# EAGLE board ETC_module (EAGLE 7.4.0)
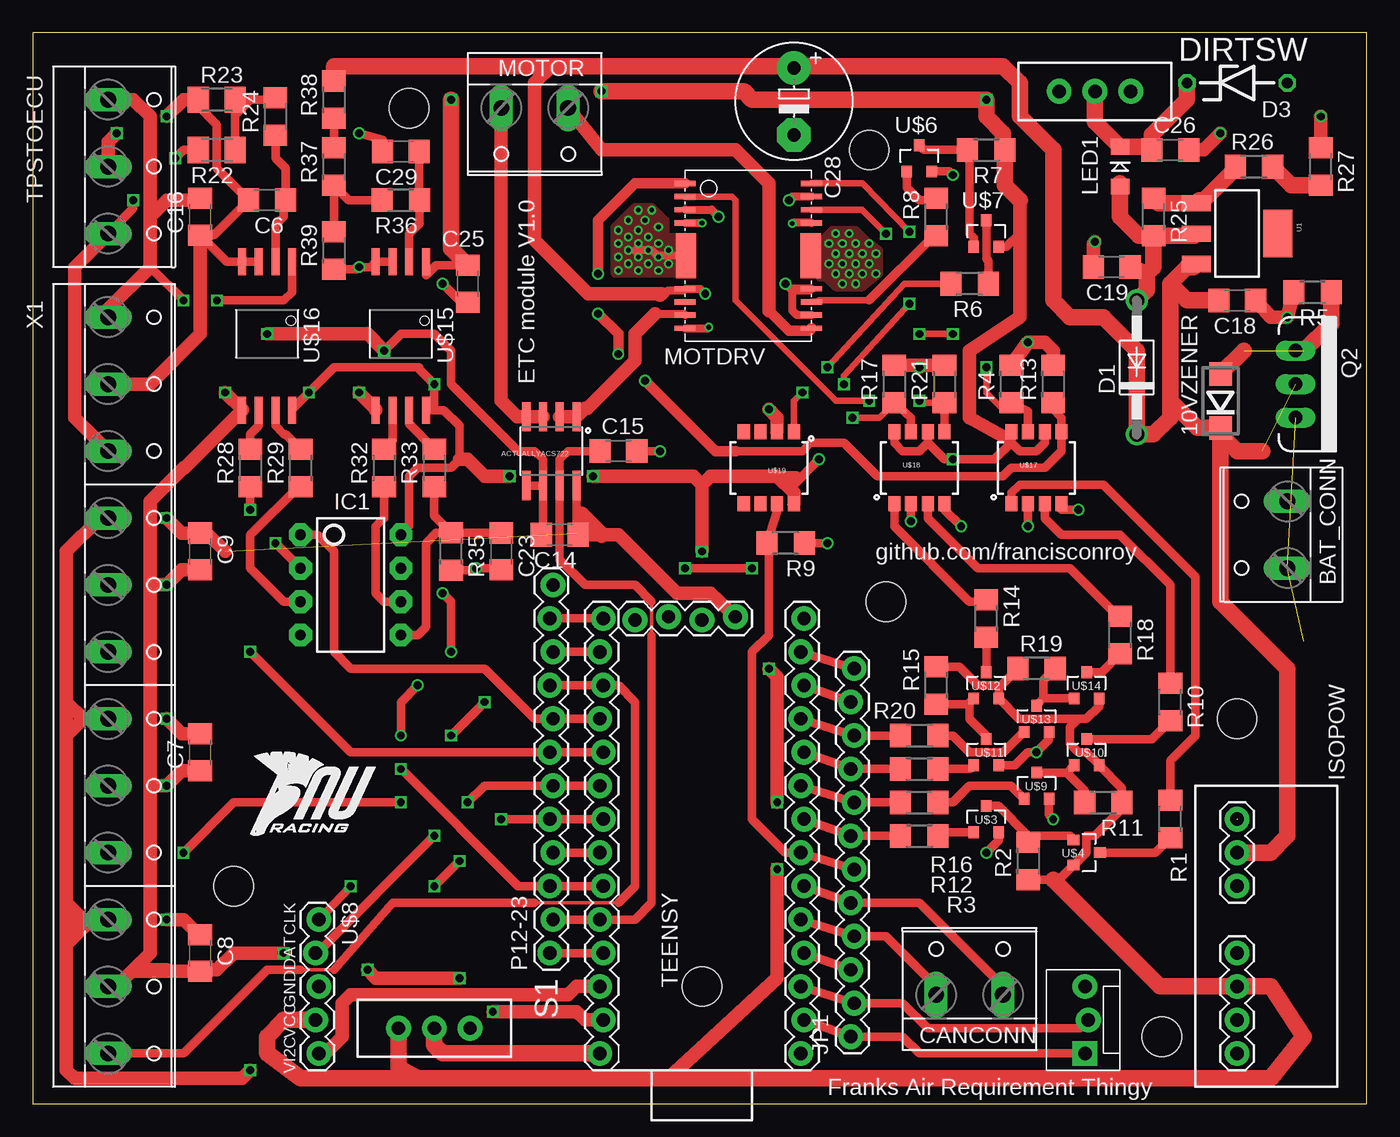
[diagram p0: board, top side]
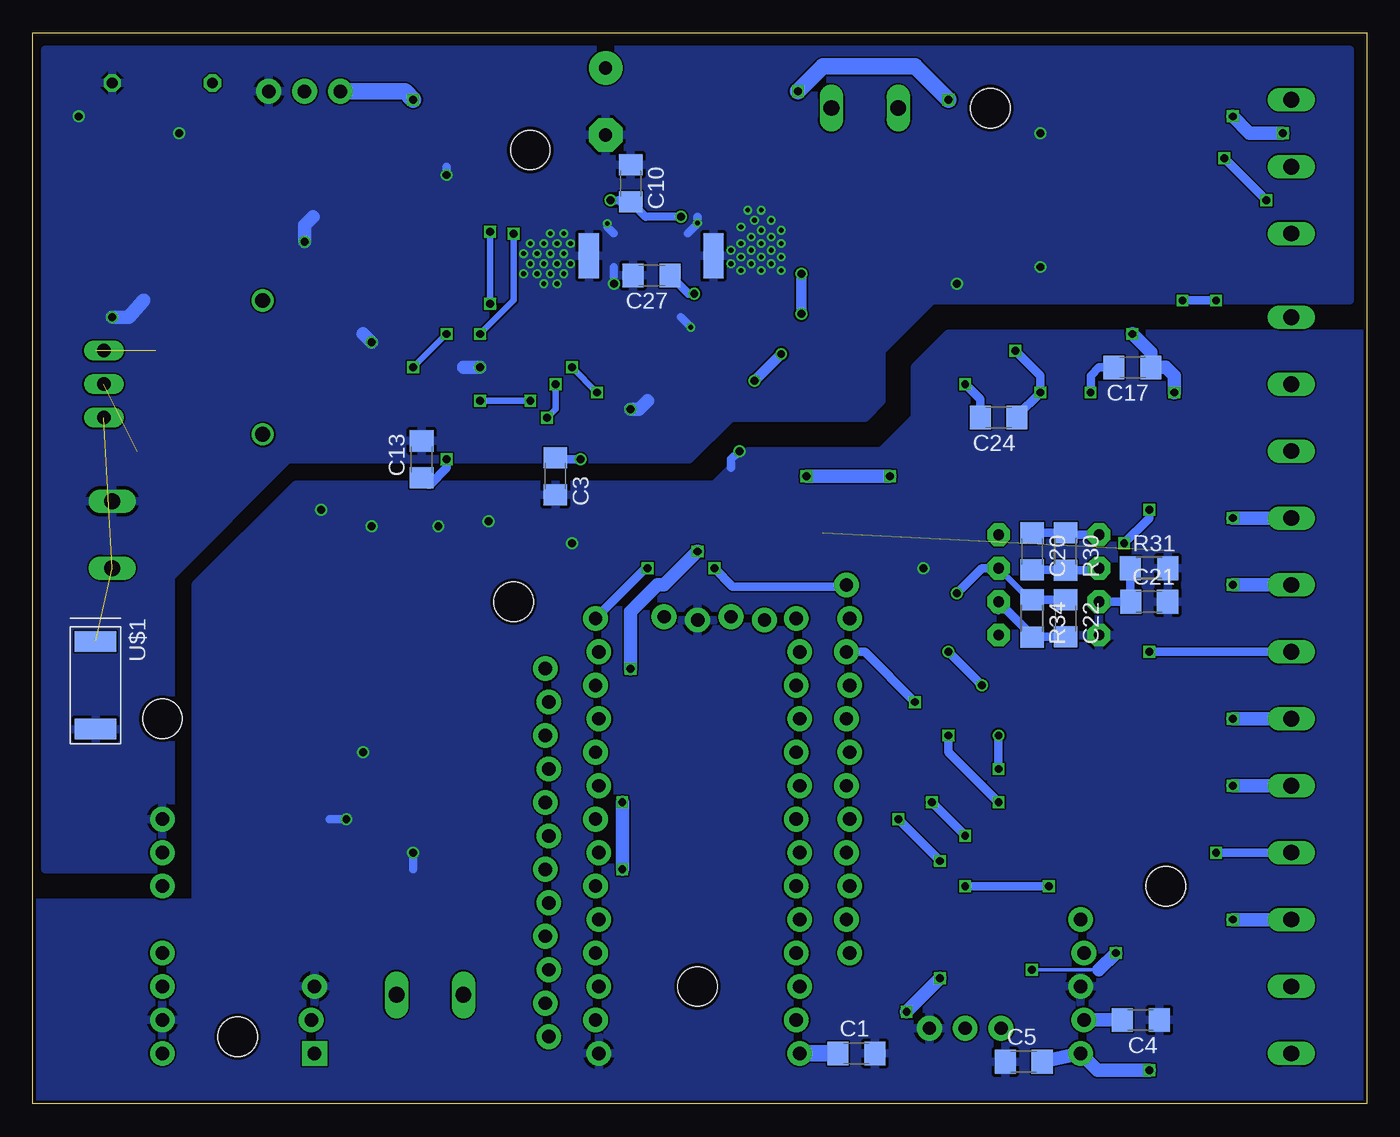
[diagram p1: board, bottom side, seen from below]

Size 101.27 x 81.27 mm. Coordinates in mm from the lower left corner, seen from the top.
Outline: 0,0 101.27,0 101.27,81.27 0,81.27 0,0
Copper layers (1*16): Top 0.035mm / dielectric 1.5mm / Bottom 0.035mm
Design rules "dirt_cheap_dirty_boards.v1": minimum track width 5mil, minimum drill 12mil, track to track 5mil, track to pad 5mil, pad to pad 5mil, via to via 5mil, smd to smd 0mil, copper to edge 10mil, drill to drill 10mil, minimum pad ring 10mil, minimum via ring 6mil, stop-mask expansion 2mil, vias tented up to drill 25mil, thermal gap 10mil
Holes 3 mm at 15.24,16.51 63.5,72.39 64.77,38.1 91.44,29.21 85.72,5.08 50.8,8.89 28.57,75.56

## Footprints (pad centres in the part's own frame; a part is rotated, then mirrored left to right if it is on the bottom)
DO214BA = smd 1.8 x 1.7: A 2.05,0; C -2.05,0
SO08 = smd 0.61 x 2.21: 1 -1.905,-2.616; 2 -0.635,-2.616; 3 0.635,-2.616; 4 1.905,-2.616; 5 1.905,2.616; 6 0.635,2.616; 7 -0.635,2.616; 8 -1.905,2.616
W237-132 = drill 1.194 long: 1 -2.54,-0.635; 2 2.54,-0.635
C1206 = smd 1.6 x 1.8: 1 -1.4,0; 2 1.4,0
E5-8,5 = drill 1.016 pad 2.54: + -2.54,0 | drill 1.016 pad 2.54 octagon: - 2.54,0
DO41-10 = drill 1.118: A 5.08,0; C -5.08,0
ZDIO-7.5 = drill 0.813 octagon: A 3.81,0; C -3.81,0
SWITCH-SPDT_KIT = drill 1.016 pad 1.88: 1 0,2.718; 2 0,0; 3 0,-2.718
DIP08 = drill 0.813 pad 1.727 octagon: 1 -3.81,-3.81; 2 -1.27,-3.81; 3 1.27,-3.81; 4 3.81,-3.81; 5 3.81,3.81; 6 1.27,3.81; 7 -1.27,3.81; 8 -3.81,3.81
TRACOPOWERDC-DCTRM2WIN = drill 1.016 pad 1.88: 1 -8.89,0; 2 -6.35,0; 3 -3.81,0; 5 1.27,0; 6 3.81,0; 7 6.35,0; 8 8.89,0
1X12_LOCK = drill 1.016 pad 1.88: 1 0,0.127; 2 2.54,-0.127; 3 5.08,0.127; 4 7.62,-0.127; 5 10.16,0.127; 6 12.7,-0.127; 7 15.24,0.127; 8 17.78,-0.127; 9 20.32,0.127; 10 22.86,-0.127; 11 25.4,0.127; 12 27.94,-0.127
MOLEX-1X3_LOCK = drill 1.016 pad 1.88 square: 1 0,0.127 | drill 1.016 pad 1.88: 2 2.54,-0.127; 3 5.08,0.127
LED-1206 = smd 1.2 x 1.4: A -1.5,0; C 1.5,0
HSOP16-P-300-1.00 = smd 0.4 x 1.6: ALERT 9,9.6; IN1 0,0; IN2 0,9.6; NC 9,0; OUT1 10,0; OUT2 11,9.6; P-GND 10,9.6; PWM 2,9.6; RSA 11,0; S-GND 3,0; S-GND2 8,9.6; S-GND3 3,9.6; SB 1,0; VCC 8,0; VREF 2,0; VREG 1,9.6 | smd 3.4 x 1.524: FIN 5.5,9.53; FIN2 5.5,0.07 | smd 3.4 x 1.524 bottom: P$4 5.5,0.07; P$20 5.5,9.53
TO220V = drill 1.016 long: 1 -2.54,0; 2 0,0; 3 2.54,0
R1206 = smd 1.6 x 1.803: 1 -1.422,0; 2 1.422,0
M1206 = smd 1.6 x 2: 1 -1.4,0; 2 1.4,0
TEENSY31PAC = drill 1.016 pad 1.88: 0 -13.97,-6.477; 1 -11.43,-6.223; 2 -8.89,-6.477; 3 -6.35,-6.223; 3.3V 16.637,-1.27; 3.3VV -11.43,9.017; 4 -3.81,-6.477; 5 -1.27,-6.223; 6 1.27,-6.477; 7 3.81,-6.223; 8 6.35,-6.477; 9 8.89,-6.223; 10 11.43,-6.477; 11 13.97,-6.223; 12 16.51,-6.477; 13 16.51,8.763; 14 13.97,9.017; 15 11.43,8.763; 16 8.89,9.017; 17 6.35,8.763; 18 3.81,9.017; 19 1.27,8.763; 20 -1.27,9.017; 21 -3.81,8.763; 22 -6.35,9.017; 23 -8.89,8.763; A14/DAC 16.383,6.35; AGND -13.97,8.763; GND -16.51,-6.223; GND2 16.383,1.27; PROG 16.637,3.81; VIN -16.51,9.017
W237-133 = drill 1.194 long: 1 -5.08,-0.635; 2 0,-0.635; 3 5.08,-0.635
SOT223 = smd 1.219 x 2.235: 1 -2.311,-3.099; 2 0,-3.099; 3 2.311,-3.099 | smd 3.6 x 2.2: 4 0,3.099
JEDECDO-214AB = smd 1.549 x 3.15: A 3.327,0; K -3.327,0
SOT23-3 = smd 0.8 x 0.9: 1 -0.95,-1; 2 0.95,-1; 3 0,1
DISP_CONN = drill 1.016 pad 1.88: 1 -5.08,0.127; 2 -2.54,-0.127; 3 0,0.127; 4 2.54,-0.127; 5 5.08,0.127
SO8STRETCH = smd 0.61 x 2.032: 1 -1.905,-5.474; 2 -0.635,-5.474; 3 0.635,-5.474; 4 1.905,-5.474; 5 1.905,5.791; 6 0.635,5.791; 7 -0.635,5.791; 8 -1.905,5.791
SO08-2 = smd 0.914 x 1.143: 1 -1.905,-2.731; 2 -0.635,-2.731; 3 0.635,-2.731; 4 1.905,-2.731; 5 1.905,2.731; 6 0.635,2.731; 7 -0.635,2.731; 8 -1.905,2.731
W237-12P = drill 1.194 long: 1 -27.94,-0.635; 2 -22.86,-0.635; 3 -17.78,-0.635; 4 -12.7,-0.635; 5 -7.62,-0.635; 6 -2.54,-0.635; 7 2.54,-0.635; 8 7.62,-0.635; 9 12.7,-0.635; 10 17.78,-0.635; 11 22.86,-0.635; 12 27.94,-0.635

## Placement (x,y rotation side)
10VZENER  [DO214BA]  90.17,53.34 90 top
ACTUALLYACS722  ACS722  [SO08]  39.37,49.53 180 top
BAT_CONN  [W237-132]  94.61,43.18 90 top
C1  0.1uF  [C1206]  38.73,3.81 0 bottom
C3  0.1uF  [C1206]  61.59,47.62 270 bottom
C4  0.1uF  [C1206]  17.14,6.35 180 bottom
C5  0.1uF  [C1206]  26.04,3.17 0 bottom
C6  10n  [C1206]  17.78,68.58 180 top
C7  0.1uF  [C1206]  12.7,26.67 90 top
C8  0.1 uF  [C1206]  12.7,11.43 270 top
C9  0.1uF  [C1206]  12.7,41.91 270 top
C10  0.1 uF  [C1206]  55.88,69.85 270 bottom
C13  0.1uF  [C1206]  71.75,48.9 90 bottom
C14  0.1 uF  [C1206]  40.01,43.18 180 top
C15  1nF  [C1206]  44.45,49.53 0 top
C16  0.1uF  [C1206]  12.7,67.31 90 top
C17  0.1uF  [C1206]  17.78,55.88 180 bottom
C18  0.1uF  [C1206]  91.44,60.96 0 top
C19  1uF  [C1206]  81.92,63.5 180 top
C20  1nF  [C1206]  25.4,41.91 270 bottom
C21  1nF  [C1206]  16.51,38.1 0 bottom
C22  1nF  [C1206]  22.86,36.83 270 bottom
C23  1nF  [C1206]  35.56,41.91 270 top
C24  0.1uF  [C1206]  27.94,52.07 180 bottom
C25  0.1uF  [C1206]  33.02,62.23 90 top
C26  0.1uF  [C1206]  86.36,72.39 0 top
C27  1uF  [C1206]  54.29,62.87 180 bottom
C28  47uF  [E5-8,5]  57.78,76.07 270 top
C29  10n  [C1206]  27.94,72.26 180 top
CANCONN  [W237-132]  71.12,8.89 0 top
D1  1N4004  [DO41-10]  83.82,55.88 90 top
D3  7.5V  [ZDIO-7.5]  91.44,77.47 0 top
DIRTSW  DIRTY 5V  [SWITCH-SPDT_KIT]  80.64,76.83 270 top
IC1  LM358  [DIP08]  24.13,39.37 270 top
ISOPOW  TRACOTMR2WIN  [TRACOPOWERDC-DCTRM2WIN]  91.44,12.7 270 top
JP1  P0-11  [1X12_LOCK]  62.23,5.08 90 top
JP3  SER  [MOLEX-1X3_LOCK]  80.01,3.81 90 top
LED1  FUSE HERE  [LED-1206]  82.55,71.12 90 top
MOTDRV  TB6559FG  [HSOP16-P-300-1.00]  49.53,69.85 270 top
MOTOR  [W237-132]  38.1,74.93 180 top
P12-23  P12-23  [1X12_LOCK]  39.37,11.43 90 top
Q2  MOSFET-PCHANNELFQP27P06  [TO220V]  95.89,54.61 270 top
R1  270  [R1206]  86.36,21.59 270 top
R2  10k  [R1206]  75.56,18.41 90 top
R3  4.7k  [R1206]  67.31,20.32 180 top
R4  1k  [R1206]  74.3,54.61 90 top
R5  1k  [R1206]  97.16,61.59 180 top
R6  270  [R1206]  71.12,62.23 0 top
R7  10k  [R1206]  72.39,72.39 180 top
R8  4.7k  [R1206]  68.58,67.31 270 top
R9  1k  [R1206]  57.15,42.55 0 top
R10  270  [R1206]  86.36,30.48 270 top
R11  10k  [R1206]  81.28,22.86 180 top
R12  4.7k  [R1206]  67.31,22.86 180 top
R13  1k  [R1206]  77.47,54.61 90 top
R14  270  [R1206]  72.39,36.83 270 top
R15  10k  [R1206]  68.58,31.75 270 top
R16  4.7k  [R1206]  67.31,25.4 180 top
R17  1k  [R1206]  65.41,54.61 90 top
R18  270  [R1206]  82.55,35.56 270 top
R19  10k  [R1206]  76.2,33.02 0 top
R20  4.7k  [R1206]  67.31,27.94 180 top
R21  1k  [R1206]  69.22,54.61 90 top
R22  3k  [M1206]  13.97,72.39 180 top
R23  2k  [M1206]  13.97,76.2 0 top
R24  39  [R1206]  18.41,74.93 90 top
R25  240  [R1206]  85.09,67.31 270 top
R26  680  [R1206]  92.71,71.12 180 top
R27  33  [R1206]  97.79,71.12 270 top
R28  20k  [R1206]  16.51,48.26 90 top
R29  20k  [R1206]  20.32,48.26 90 top
R30  40k  [R1206]  22.86,41.91 270 bottom
R31  20k  [R1206]  16.51,40.64 0 bottom
R32  20k  [R1206]  26.67,48.26 90 top
R33  20k  [R1206]  30.48,48.26 90 top
R34  40k  [R1206]  25.4,36.83 270 bottom
R35  20k  [R1206]  31.75,41.91 270 top
R36  39  [R1206]  27.94,68.58 180 top
R37  56k  [R1206]  22.86,71.12 90 top
R38  4k7  [R1206]  22.86,76.2 90 top
R39  9k1  [R1206]  22.86,64.77 90 top
S1  LOGIC POWER  [SWITCH-SPDT_KIT]  30.48,5.71 270 top
TEENSY  TEENSY31DEV  [TEENSY31PAC]  52.07,20.32 90 top
TPSTOECU  [W237-133]  6.35,71.12 270 top
U1  V_REG_317SMD  [SOT223]  91.44,66.04 270 top
U$1  LNBTVS  [JEDECDO-214AB]  96.52,31.75 270 bottom
U$3  NPN_TRAN  [SOT23-3]  72.39,21.59 0 top
U$4  PNP_TRAN  [SOT23-3]  80.01,19.05 270 top
U$6  NPN_TRAN  [SOT23-3]  67.31,71.75 0 top
U$7  PNP_TRAN  [SOT23-3]  72.39,66.04 0 top
U$8  DISP_CONN  [DISP_CONN]  21.59,8.89 270 top
U$9  NPN_TRAN  [SOT23-3]  76.2,24.13 0 top
U$10  PNP_TRAN  [SOT23-3]  80.01,26.67 0 top
U$11  NPN_TRAN  [SOT23-3]  72.39,26.67 0 top
U$12  PNP_TRAN  [SOT23-3]  72.39,31.75 0 top
U$13  NPN_TRAN  [SOT23-3]  76.2,29.21 0 top
U$14  PNP_TRAN  [SOT23-3]  80.01,31.75 0 top
U$15  ACPLC87BT  [SO8STRETCH]  27.94,58.42 180 top
U$16  ACPLC87BT  [SO8STRETCH]  17.78,58.42 180 top
U$17  OPTOISOLATOR-2SOIC8  [SO08-2]  76.2,48.26 0 top
U$18  OPTOISOLATOR-2SOIC8  [SO08-2]  67.31,48.26 0 top
U$19  OPTOISOLATOR-2SOIC8  [SO08-2]  55.88,48.26 180 top
U$20  [NURLOGO]  16.51,20.32 0 top
X1  [W237-12P]  6.35,31.75 270 top

## Library data of the parts
10VZENER D1 D3 = diode
ACTUALLYACS722 = SparkFun-AnalogIC; PROD_ID: IC-08964
BAT_CONN CANCONN MOTOR TPSTOECU X1 = con-wago-508; OC_FARNELL: unknown; OC_NEWARK: unknown
C1 C3 C13 C26 R1-R4 R6-R21 = resistor
C4-C10 C14-C25 C27-C29 R5 R22-R39 = rcl
DIRTSW S1 = SparkFun-Electromechanical; PROD_ID: SWCH-08261
IC1 = SparkFun-AnalogIC; PROD_ID: IC-09172
ISOPOW MOTDRV TEENSY U$1 U$3 U$4 U$6-U$16 U$20 = custom
JP1 JP3 P12-23 = SparkFun-Connectors
LED1 = LilyPad-Wearables
Q2 = SparkFun-DiscreteSemi
U1 = SparkFun-PowerIC
U$17-U$19 = SparkFun-DiscreteSemi; PROD_ID: IC-09076

## Nets
5VOUT: C10.2 MOTDRV.VREF MOTDRV.VREG
+3V3: ACTUALLYACS722.8 C5.2 C7.2 C8.1 C9.1 C14.1 TEENSY.3.3V TEENSY.3.3VV U$8.5 X1.4 X1.7 X1.10
+5V/1: C13.1 C25.2 DIRTSW.3 R7.1 U$7.2 U$15.1 U$17.6 U$17.8 U$18.6 U$18.8
+5VCLEAN: C3.1 C4.2 C17.2 C24.2 IC1.8 ISOPOW.6 R2.1 R11.1 R15.1 R19.1 S1.3 U$4.2 U$8.4 U$10.2 U$12.2 U$14.2 U$15.8 U$16.8 U$19.8
+12V: 10VZENER.C C18.1 C27.1 C28.+ D1.C ISOPOW.2 MOTDRV.VCC Q2.2 R38.2 U1.3
AGND: ACTUALLYACS722.5 ACTUALLYACS722.6 C7.1 C8.2 C9.2 C14.2 C17.1 C24.1 TEENSY.AGND U$15.5 U$16.5 X1.5 X1.8 X1.11
ECU5V: C16.2 TPSTOECU.1 U$16.1 X1.1
ECUSENSGND: C6.2 C16.1 R23.1 TPSTOECU.2 U$16.3 U$16.4 X1.2
ECUTPS: R22.2 TPSTOECU.3 X1.3
GND: C1.2 C3.2 C4.1 C5.1 C15.2 C21.2 C23.2 IC1.4 ISOPOW.7 JP3.3 R9.2 R31.2 R35.2 S1.1 TEENSY.GND TEENSY.GND2 U$3.2 U$8.3 U$9.2 U$11.2 U$13.2 U$17.2 U$17.4 U$18.2 U$18.4
GNDI: BAT_CONN.2 C10.1 C13.2 C18.2 C19.2 C25.1 C26.2 C27.2 C28.- C29.2 D3.A DIRTSW.1 ISOPOW.1 MOTDRV.FIN MOTDRV.FIN2 MOTDRV.P$4 MOTDRV.P$20 MOTDRV.P-GND MOTDRV.RSA MOTDRV.S-GND MOTDRV.S-GND2 MOTDRV.S-GND3 R4.2 R5.2 R13.2 R17.2 R21.2 R27.1 R39.1 U$1.A U$6.2 U$15.3 U$15.4 U$19.2
N$1: R2.2 U$3.3 U$4.1
N$2: C1.1 S1.2 TEENSY.VIN
N$3: R1.1 U$17.1
N$4: R1.2 U$4.3
N$5: R3.1 U$3.1
N$6: R7.2 U$6.3 U$7.1
N$7: 10VZENER.A Q2.1 R5.1
N$8: MOTDRV.PWM R4.1 U$17.7
N$9: R6.1 U$19.1
N$10: R6.2 U$7.3
N$11: R8.1 U$6.1
N$12: R19.2 U$13.3 U$14.1
N$14: R18.1 U$18.3
N$15: C26.1 D3.C DIRTSW.2 LED1.C
N$16: R37.2 R38.1
N$17: C19.1 D1.A LED1.A R25.2 U1.2
N$18: R11.2 U$9.3 U$10.1
N$19: MOTDRV.OUT2 MOTOR.1
N$20: ACTUALLYACS722.1 ACTUALLYACS722.2 MOTDRV.OUT1
N$21: R10.1 U$17.3
N$22: R10.2 U$10.3
N$23: R12.1 U$9.1
N$25: R15.2 U$11.3 U$12.1
N$26: R14.1 U$18.1
N$27: R14.2 U$12.3
N$28: R16.1 U$11.1
N$29: MOTDRV.IN2 R17.1 U$18.7
N$30: R18.2 U$14.3
N$31: R20.1 U$13.1
N$32: MOTDRV.ALERT R8.2
N$33: MOTDRV.SB R21.1 U$18.5
N$34: ACTUALLYACS722.3 ACTUALLYACS722.4 MOTOR.2
N$35: C6.1 R24.1 U$16.2
N$36: R22.1 R23.2 R24.2
N$37: R26.1 R27.2
N$38: R25.1 R26.2 U1.1
N$39: R36.2 R37.1 R39.2
N$40: C23.1 IC1.5 R33.1 R35.1
N$41: C22.2 IC1.6 R32.1 R34.2
N$42: R32.2 U$15.6
N$43: MOTDRV.IN1 R13.1 U$17.5
N$44: R29.2 U$16.7
N$45: C21.1 IC1.3 R29.1 R31.1
N$46: C20.2 IC1.2 R28.1 R30.2
N$47: R28.2 U$16.6
N$48: C29.1 R36.1 U$15.2
N$52: R33.2 U$15.7
N$58: BAT_CONN.1 Q2.3 U$1.K
P0: JP1.1 JP3.1 TEENSY.0
P1: JP1.2 JP3.2 TEENSY.1
P2: JP1.3 TEENSY.2
P3: CANCONN.1 JP1.4 TEENSY.3
P4: CANCONN.2 JP1.5 TEENSY.4
P5: JP1.6 R9.1 TEENSY.5 U$19.7
P6: JP1.7 R3.2 TEENSY.6
P7: JP1.8 R12.2 TEENSY.7
P8: JP1.9 R16.2 TEENSY.8
P9: JP1.10 R20.2 TEENSY.9
P10: JP1.11 TEENSY.10
P11: JP1.12 TEENSY.11
P12: P12-23.12 TEENSY.12
P13: P12-23.11 TEENSY.13
P14: P12-23.10 TEENSY.14 X1.9
P15: P12-23.9 TEENSY.15 X1.12
P16: C20.1 IC1.1 P12-23.8 R30.1 TEENSY.16
P17: P12-23.7 TEENSY.17 X1.6
P18: P12-23.6 TEENSY.18 U$8.2
P19: P12-23.5 TEENSY.19 U$8.1
P20: P12-23.4 TEENSY.20
P21: C22.1 IC1.7 P12-23.3 R34.1 TEENSY.21
P22: ACTUALLYACS722.7 C15.1 P12-23.2 TEENSY.22
P23: P12-23.1 TEENSY.23

## Tracks (layer width: path | path; a pad name or v marks a point on that pad's centre or on a via)
5VOUT  (via drill 0.6)
  Top 0.61: MOTDRV.VREF 51.53,67.85 v52.07,67.31 | MOTDRV.VREG 57.67,68.85 v57.4,68.58
  Bottom 0.61: v52.07,67.31 54.74,67.31 C10.2 56.26,68.07 56.77,68.58 v57.4,68.58
  Bottom 0.635: 55.38,67.94 C10.2 56.01,68.58
+3V3  (via drill 0.6)  (1 unrouted)
  Top 0.635: ACTUALLYACS722.8 41.27,43.31 C14.1
  Top 1.016: TEENSY.3.3VV 41.27,8.89 40.64,8.26 24.13,8.26 23.5,7.62 23.5,5.08 22.23,3.81 U$8.5 | 2.54,12.06 4.45,13.97 X1.10 3.81,13.97 | 2.54,12.06 2.54,2.54 3.17,1.91 15.88,1.91 v16.51,2.54 | 3.81,13.97 2.54,15.24 | 2.54,15.24 2.54,27.94 | 2.54,27.94 2.54,30.48 | 2.54,30.48 2.54,41.91 5.08,44.45 X1.4 | C7.2 11.3,28.07 v10.16,29.21 | v10.16,44.45 11.3,43.31 C9.1 13.21,43.31 14.61,41.91 | C8.1 12.57,12.83 11.43,13.97 v10.16,13.97 | TEENSY.3.3V 51.44,38.73 48.9,38.73 44.45,43.18 43.18,43.18 C14.1 | X1.7 3.81,29.21 | 3.81,29.21 2.54,27.94 | 3.81,29.21 2.54,30.48 | 2.54,15.24 2.54,13.97 | 2.54,12.06 2.54,12.7 | 2.54,12.7 2.54,13.97 | 2.54,13.97 3.81,13.97 | 3.81,13.97 2.54,12.7
  Top 1.27: 43.18,43.18 41.66,44.7
  Bottom 1.016: v16.51,2.54 20.45,2.54 U$8.5 C5.2 | v10.16,29.21 X1.7 | v10.16,44.45 X1.4 | v10.16,13.97 X1.10 5.08,13.97
+5V/1  (via drill 0.6)
  Top 0.635: C25.2 30.61,63.63 29.84,62.87 U$15.1 | U$18.8 65.41,50.16 66.04,49.53 67.31,49.53 67.94,50.16 | 67.94,50.16 U$18.6 | U$17.6 76.83,50.16 76.2,49.53 74.93,49.53 74.3,50.16 | 74.3,50.16 U$17.8 74.3,50.8 73.98,50.48 | 67.94,50.16 69.22,48.9 v69.85,48.9 73.03,48.9 74.3,50.16 | U$7.2 73.93,65.04 74.93,66.04
  Top 1.016: 74.93,68.58 74.93,66.04 74.93,59.69 71.12,57.15 71.12,52.07 73.98,50.48
  Top 1.27: v72.39,76.2 68.58,76.2 | v72.39,76.2 54.61,76.2 53.98,76.83 v43.18,76.83 | v31.75,76.2 31.75,64.9 C25.2 | v72.39,76.2 72.39,74.93 73.66,73.66 73.66,72.54 R7.1 73.81,69.7 74.93,68.58
  Bottom 0.635: v69.85,48.9 69.85,48.26 71.12,46.99 71.25,46.99 C13.1
  Bottom 1.27: DIRTSW.3 73.03,76.83 v72.39,76.2 | v43.18,76.83 41.27,78.74 34.29,78.74 v31.75,76.2
+5VCLEAN  (via drill 0.6)
  Top 0.635: U$14.2 80.96,30.16 80.01,29.21 79.38,29.21 | 79.38,29.21 74.88,29.21 U$12.2 73.34,31.58 | 73.34,31.58 R19.1 | 79.38,29.21 78.74,28.57 78.74,27.3 79.38,26.67 80.01,26.67 80.96,25.72 U$10.2 82.7,23.93 R11.1 82.55,22.71 82.55,22.23 80.64,20.32 80.01,20.32 80.01,19.05 79.06,18.1 U$4.2 77.9,16.99 77.47,16.99 R2.1 | R15.1 70.33,33.17 71.75,31.75 73.17,31.75 73.34,31.58 | v59.69,48.9 57.78,46.99 57.78,46.35 | IC1.8 28.57,43.81 28.57,47.62 29.21,48.26 31.75,48.26 32.38,48.9 32.38,51.44 31.19,52.63 30.48,52.63 | U$15.8 30.48,52.63 | 30.48,52.63 v30.48,54.61 29.34,55.75 29.34,55.88 22.86,55.88 v20.95,53.98 19.68,52.7 U$16.8
  Top 1.016: 48.26,1.91 56.52,9.53 v56.52,17.78 | U$19.8 57.78,46.35 56.52,47.62 51.44,47.62 50.8,46.99 | 50.8,46.99 v50.8,41.91 | 50.8,46.99 50.16,47.62 v42.55,47.62 | v36.2,47.62 34.29,47.62 33.02,48.9 32.38,48.9 | v56.52,22.86 56.52,32.38 v55.88,33.02
  Top 1.27: 77.47,16.99 85.57,8.89 ISOPOW.6 93.98,8.89 96.52,5.08 93.98,1.91 48.26,1.91 29.21,1.91 | S1.3 27.76,2.72 29.21,1.91 | 29.21,1.91 20.32,1.91 17.78,3.81 17.78,5.08 19.05,6.35 U$8.4 | 21.33,6.22 U$8.4 | 20.32,6.35 U$8.4
  Bottom 0.635: C3.1 61.47,48.9 v59.69,48.9 | C24.2 29.34,53.47 v30.48,54.61 | C17.2 20.32,55.88 20.95,55.24 v20.95,53.98
  Bottom 1.016: C4.2 U$8.4 | v56.52,17.78 v56.52,22.86 | v42.55,47.62 v36.2,47.62 | v50.8,41.91 53.34,39.37 53.85,39.37 55.88,37.34 v55.88,33.02
+12V  (via drill 0.6)  (1 unrouted)
  Top 0.61: 47.75,61.47 48.01,61.47 48.26,61.72 49.4,61.72 MOTDRV.VCC 50.67,61.85 v51.05,61.47
  Top 1.016: 39.37,78.74 38.1,77.47 38.1,65.53 42.16,61.47 47.75,61.47 47.62,61.34 | C28.+ 62.1,78.61 62.23,78.74
  Top 1.27: ISOPOW.2 93.98,19.05 95.25,20.32 95.25,33.02 90.17,38.1 10VZENER.C | 10VZENER.C 90.17,50.8 91.44,49.53 93.34,49.53 | 10VZENER.C 88.41,51.29 86.36,53.34 | 86.36,53.34 86.36,62.23 | 86.36,62.23 87.63,63.5 88.11,63.5 U1.3 | C18.1 87.63,60.96 86.36,62.23 | 86.36,53.34 86.36,52.07 85.09,50.8 D1.C 83.82,57.15 81.28,59.69 78.74,59.69 77.47,60.96 77.47,72.39 74.93,74.93 74.93,77.47 73.66,78.74 62.23,78.74 39.37,78.74 22.86,78.74 R38.2
  Bottom 0.61: C27.1 51.49,61.47 v51.05,61.47
AGND  (via drill 0.6)
  Top 0.635: ACTUALLYACS722.6 38.73,43.31 C14.2 | ACTUALLYACS722.6 38.73,48.9 38.1,49.53 36.83,49.53 31.75,54.61 31.75,57.15 30.48,58.42 27.94,58.42 v26.67,57.15 | ACTUALLYACS722.6 ACTUALLYACS722.5
  Top 1.016: TEENSY.AGND 41.91,6.35 41.27,6.99 v34.92,6.99 | v32.38,9.53 26.04,9.53 v25.4,10.16 | v19.05,11.43 15.24,11.43 13.97,10.16 12.83,10.16 C8.2 7.49,10.03 | 7.49,10.03 6.35,8.89 X1.11 | 7.49,10.03 7.62,10.16 | 7.62,10.16 10.16,10.16 | 7.62,10.16 8.89,11.43 8.89,24.13 | v14.61,53.98 15.88,52.7 U$16.5 11.51,48.26 11.43,48.26 8.89,45.72 8.89,39.37 | U$15.5 26.04,52.7 v24.77,53.98 | v17.78,58.42 25.4,58.42 v26.67,57.15 | 8.89,39.37 8.89,24.13 | C7.1 11.3,25.27 v10.16,24.13 8.89,24.13 | C9.2 11.3,40.51 v10.16,39.37 8.89,39.37
  Bottom 0.254: v25.4,10.16 20.32,10.16
  Bottom 0.635: v26.67,57.15 24.77,55.24 v24.77,53.98 26.54,52.2 C24.1
  Bottom 1.016: v34.92,6.99 v32.38,9.53 | 20.32,10.16 v19.05,11.43 | v14.61,53.98 14.61,55.24 15.24,55.88 C17.1 16.38,57.02 v17.78,58.42 | v10.16,24.13 X1.8 | v10.16,39.37 X1.5
ECU5V  (via drill 0.6)
  Top 0.635: U$16.1 19.68,61.59 19.05,60.96 v13.97,60.96 | v11.43,60.96 8.89,63.5
  Top 1.016: X1.1 5.71,60.33 8.89,63.5 8.89,67.31 | 8.89,67.31 8.89,74.93 7.62,76.2 TPSTOECU.1 | 8.89,67.31 10.16,68.58 12.57,68.58 C16.2
  Bottom 0.635: v13.97,60.96 v11.43,60.96
ECUSENSGND  (via drill 0.6)
  Top 0.635: U$16.3 U$16.4 14.72,63.89 C16.1 13.71,65.91 C6.2 13.97,70.99 13.97,74.3 12.57,75.69 R23.1
  Top 1.016: X1.2 8.89,54.61 12.7,58.42 C16.1 | TPSTOECU.2 5.71,73.03 v6.35,73.66 | v10.16,74.93 11.43,76.2 R23.1
  Bottom 1.016: v6.35,73.66 8.89,73.66 v10.16,74.93
ECUTPS  (via drill 0.6)
  Top 0.635: R22.2 11.43,72.39 v10.79,71.75 | v7.62,68.58 7.62,67.94 TPSTOECU.3
  Top 1.016: X1.3 3.17,52.07 3.17,63.5 TPSTOECU.3
  Bottom 0.635: v10.79,71.75 v7.62,68.58
GND  (via drill 0.6)
  Top 0.635: R35.2 33.5,40.49 v33.66,40.64 35.43,40.64 C23.2 | R9.2 v60.33,42.55 | U$18.2 v66.67,44.2 | U$18.4 69.22,45.09 v70.48,43.81 | U$17.4 78.11,45.09 v79.38,45.09 | U$17.2 v75.56,43.81 | U$13.2 77.15,27.62 v76.2,26.67 75.56,26.67 74.56,25.67 U$11.2 | U$9.2 77.15,21.91 v77.47,21.59 | U$3.2 73.34,20 v72.39,19.05 | C15.2 v47.62,49.53
  Bottom 0.635: v77.47,21.59 78.74,21.59 | v72.39,19.05 72.39,17.78 | v47.62,49.53 48.26,48.9 48.26,48.26
  pour Bottom: 0,0 101.6,0 101.6,15.24 88.9,15.24 88.9,39.37 81.28,46.99 49.53,46.99 46.99,49.53 36.83,49.53 34.29,52.07 34.29,55.88 31.75,58.42 0,58.42
GNDI  (via drill 0.36 pad 0.41, 0.6)
  Top 0.61: MOTDRV.P-GND 58.01,59.85 57.66,60.2 57.66,61.47 57.91,61.72 59,61.72 MOTDRV.S-GND2 57.53,61.85 v57.15,62.23 | MOTDRV.P$4 47.41,64.35 46.99,64.77 v46.74,64.77 45.72,64.77 | MOTDRV.S-GND3 57.71,66.85 v57.66,66.8 | MOTDRV.S-GND v50.8,66.85 | MOTDRV.RSA 51.23,58.85 v51.31,58.93
  Top 0.635: R39.1 24.61,63.35 v24.77,63.5 25.64,63.5 U$15.4 U$15.3 | C29.2 26.54,73.16 v24.77,73.66 | C25.1 32.52,60.83 v31.11,62.23 | U$6.2 69.58,70.75 v69.85,70.48
  Top 1.016: U$19.2 56.52,52.07 v55.88,52.7 | C19.2 80.52,65.28 v80.64,65.41 | C26.2 88.9,72.39 v90.17,73.66 | R27.1 v97.79,74.93 | R5.2 v95.25,59.69 93.98,59.69 C18.2 92.71,60.96 | R4.2 v75.56,57.78 76.83,57.78 77.47,57.15 R13.2 | R17.2 67.16,56.03 v67.31,55.88 67.46,56.03 R21.2
  Bottom 0.61: v57.15,62.23 57.15,63.5 | v57.66,66.8 57.66,66.55 57.15,66.04 | v50.8,66.85 50.8,66.8 51.56,66.04 | v51.31,58.93 52.07,59.69
  Bottom 0.635: v69.85,70.48 69.85,71.12 | 50.8,67.31 v50.8,66.85
  Bottom 1.016: v55.88,52.7 55.24,52.7 54.61,53.34 | v80.64,65.41 80.64,66.67 80.01,67.31 | v95.25,59.69 93.98,59.69 C18.2 | v75.56,57.78 76.2,58.42 | v67.31,55.88 68.58,55.88
  other vias: 44.45,66.29 45.21,67.06 45.97,67.82 46.99,67.82 46.48,67.06 47.5,66.55 47.5,65.28 45.97,66.29 46.74,65.79 45.21,65.79 45.97,65.28 44.45,65.28 45.21,64.77 44.45,64.26 44.45,63.25 45.21,63.75 45.97,63.25 45.97,64.26 46.74,63.75 47.5,64.26 48.26,64.77 48.26,63.75 47.5,63.25 60.96,66.04 61.98,66.04 62.48,65.28 61.47,65.28 60.45,65.28 60.96,64.52 60.45,63.75 60.96,62.99 61.47,62.23 62.48,62.23 61.98,62.99 61.47,63.75 61.98,64.52 62.99,64.52 63.5,65.28 64.01,64.52 62.48,63.75 63.5,63.75 62.99,62.99 64.01,62.99
  pour Bottom: 100.33,80.01 100.33,17.78 90.81,17.78 90.81,40.01 81.92,48.9 51.44,48.9 48.26,52.07 38.1,52.07 36.83,53.34 36.83,57.15 33.02,60.96 1.27,60.96 1.27,80.01
  pour Top (no thermals): 49.02,62.99 44.2,62.99 44.2,66.55 45.72,68.07 46.99,68.07 48.01,67.06 48.01,66.04 48.26,65.79 49.28,65.79 49.28,63.25
  pour Top (no thermals): 59.69,62.74 60.2,62.74 60.96,61.98 62.99,61.98 64.26,62.99 64.26,64.77 63.25,65.53 62.48,66.29 60.71,66.29 59.69,65.28
N$1
  Top 0.635: U$3.3 73.3,22.59 75.56,20.32 R2.2 76.05,20.32 78.74,20.32 79.01,20.05 U$4.1
N$2
  Top 1.27: TEENSY.VIN 31.11,3.81 30.48,4.45 S1.2
  Bottom 1.27: C1.1 TEENSY.VIN
N$3
  Top 0.635: R1.1 86.36,26.04 88.27,27.94 88.27,40.01 81.28,46.99 74.93,46.99 74.3,46.35 U$17.1
N$4
  Top 0.635: U$4.3 85.24,19.05 R1.2
N$5
  Top 0.635: U$3.1 69,20.59 R3.1
N$6
  Top 0.635: U$7.1 71.44,65.72 71.12,66.04 71.12,72.24 R7.2 67.67,72.39 U$6.3
N$7  (2 unrouted)
  Top 1.27: 91.93,57.15 10VZENER.A | R5.1 98.58,59.21 96.52,57.15
N$8  (via drill 0.6)
  Top 0.508: MOTDRV.PWM 62.96,67.85 v64.77,66.04 | v67.31,58.42 v69.85,58.42 | v72.39,55.88 72.39,53.98 73.66,52.7 73.81,52.7 R4.1
  Top 0.635: U$17.7 75.56,52.55 R4.1
  Bottom 0.508: v64.77,66.04 64.77,60.96 v67.31,58.42 | v69.85,58.42 v72.39,55.88
N$9  (via drill 0.6)
  Top 0.508: U$19.1 57.78,53.34 v58.42,53.98 | v60.33,55.88 66.17,62.23 R6.1
  Bottom 0.508: v58.42,53.98 v60.33,55.88
N$10
  Top 0.635: R6.2 72.54,63.98 72.39,64.14 U$7.3
N$11
  Top 0.635: U$6.1 66.36,69.53 67.31,68.58 68.43,68.58 R8.1
N$12
  Top 0.635: U$14.1 76.74,30.75 | 76.74,30.75 U$13.3 | 76.74,30.75 76.74,32.14 R19.2
N$14
  Top 0.635: R18.1 82.4,36.98 78.74,40.64 71.75,40.64 67.94,44.45 U$18.3
N$15
  Top 1.27: DIRTSW.2 80.64,74.53 LED1.C 84.73,72.62 C26.1 84.96,73.53 87.63,76.2 D3.C
N$16
  Top 0.635: R37.2 R38.1
N$17
  Top 1.27: C19.1 84.58,62.99 | 84.58,62.99 85.09,63.5 R25.2 | R25.2 88.19,65.89 U1.2 | R25.2 83.97,65.89 82.55,67.31 LED1.A 82.55,69.85 | 84.58,62.99 84.58,61.73 D1.A
N$18
  Top 0.635: U$9.3 78.52,25.13 | 78.52,25.13 U$10.1 | R11.2 79.86,23.79 78.52,25.13
N$19
  Top 0.813: 55.88,60.2 57.4,58.67 58.95,58.67 MOTDRV.OUT2
  Top 1.016: MOTOR.1 43.18,72.39 53.34,72.39 55.88,69.85 55.88,60.2
N$20
  Top 0.61: 47.24,59.94 49.44,59.94 MOTDRV.OUT1
  Top 1.016: ACTUALLYACS722.2 ACTUALLYACS722.1 41.91,52.78 42.11,52.78 45.72,56.39 45.72,58.42 47.24,59.94
N$21
  Top 0.635: R10.1 86.36,39.37 82.55,43.18 78.11,43.18 76.83,44.45 U$17.3
N$22
  Top 0.635: U$10.3 84.97,27.67 R10.2
N$23
  Top 0.635: R12.1 69.85,22.86 71.12,24.13 74.25,24.13 U$9.1
N$25
  Top 0.635: U$11.3 72.39,27.94 71.12,29.21 71.12,30.43 U$12.1 71.02,30.33 R15.2
N$26
  Top 0.635: U$18.1 65.41,43.81 71.12,38.1 72.24,38.1 R14.1
N$27
  Top 0.635: U$12.3 R14.2
N$28
  Top 0.635: R16.1 71.17,25.4 U$11.1
N$29  (via drill 0.6)
  Top 0.508: R17.1 64.29,52.07 v62.23,52.07 | v66.55,66.17 62.99,69.85 MOTDRV.IN2 | v66.55,60.71 61.59,55.24 v61.59,54.61
  Top 0.635: U$18.7 66.67,52.07 R17.1
  Bottom 0.508: v62.23,52.07 61.59,52.7 v61.59,54.61 | v66.55,60.71 v66.55,66.17
N$30
  Top 0.635: U$14.3 81.16,32.75 R18.2
N$31
  Top 0.635: R20.1 69.85,27.94 71.12,26.67 73.71,26.67 U$13.1
N$32
  Top 0.508: 63.5,60.96 60.29,60.96 | 59.69,60.96 60.29,60.96 | 60.29,60.96 MOTDRV.ALERT
  Top 0.635: R8.2 68.43,65.89 63.5,60.96
N$33  (via drill 0.6)
  Top 0.508: MOTDRV.SB 53.07,68.85 53.34,68.58 53.34,60.96 60.96,53.34 v63.5,53.34 | v67.31,53.34 67.46,53.19 R21.1
  Top 0.635: U$18.5 R21.1
  Bottom 0.508: v63.5,53.34 v67.31,53.34
N$34
  Top 1.016: ACTUALLYACS722.3 ACTUALLYACS722.4 36.75,52.15 35.56,53.34 MOTOR.2
N$35
  Top 0.635: U$16.2 18.41,66.67 19.05,67.31 19.05,68.45 C6.1 19.18,70.99 18.41,71.75 R24.1
N$36
  Top 0.635: 15.37,76.07 R23.2 15.37,75.06 | R22.1 15.37,75.06 | 15.37,75.06 16.51,76.2 18.26,76.2 R24.2
N$37
  Top 1.27: R27.2 95.55,69.7 R26.1
N$38
  Top 1.27: R26.2 91.29,70.97 88.9,68.58 88.57,68.58 U1.1 85.47,68.35 R25.1
N$39
  Top 0.635: R39.2 R37.1 23.98,68.58 R36.2
N$40
  Top 0.635: R33.1 30.48,44.6 R35.1 | R35.1 35.54,43.33 C23.1 | R35.1 30.63,43.33 29.84,42.55 29.84,36.2 29.21,35.56 IC1.5
N$41
  Top 0.635: R32.1 26.67,44.45 26.04,43.81 26.04,38.73 26.67,38.1 IC1.6
  Bottom 0.635: C22.2 25.38,35.43 R34.2 25.55,35.41 | 27.94,37.47 IC1.6 25.4,35.56 25.55,35.41 | 25.88,35.41 25.55,35.41
N$42
  Top 0.635: U$15.6 27.3,50.32 R32.2
N$43  (via drill 0.6)
  Top 0.635: 53.34,49.53 58.42,49.53 59.05,50.16 61.59,50.16 64.14,47.62 73.66,47.62 74.3,48.26 76.83,48.26 78.11,49.53 U$17.5 78.11,52.07 77.47,52.7 R13.1
  Top 0.813: 53.34,49.53 51.82,49.53 v46.48,54.86 | v44.45,56.9 44.45,58.42 v42.93,59.94 | v42.93,62.99 42.93,67.06 45.72,69.85 MOTDRV.IN1
  Bottom 0.813: v46.48,54.86 v44.45,56.9 | v42.93,59.94 v42.93,62.99
N$44
  Top 0.635: U$16.7 18.41,51.44 19.05,50.8 19.2,50.8 R29.2
N$45
  Top 0.635: R29.1 20.17,46.84 16.51,43.18 16.51,40.64 19.05,38.1 IC1.3
  Bottom 0.635: IC1.3 C21.1 17.93,38.12 R31.1
N$46  (via drill 0.6)
  Top 0.635: R28.1 v16.51,45.09 | v18.41,42.55 IC1.2
  Bottom 0.635: v16.51,45.09 16.51,44.45 v18.41,42.55 | C20.2 22.88,40.51 R30.2 20.47,40.49 IC1.2
N$47
  Top 0.635: R28.2 16.51,50.8 17.14,51.44 U$16.6
N$48
  Top 0.635: C29.1 29.34,68.6 R36.1 29.36,66.83 28.57,66.04 U$15.2
N$52
  Top 0.635: U$15.7 28.57,51.59 R33.2
N$56
  Top 1.016: 56.9,47.5 57.91,47.5
N$58  (2 unrouted)
P0
  Top 0.635: TEENSY.0 JP1.1 66.04,5.08 67.31,3.81 JP3.1
P1
  Top 0.635: TEENSY.1 JP1.2 66.04,7.62 67.94,5.71 79.5,5.71 JP3.2
P2
  Top 0.635: JP1.3 TEENSY.2
P3
  Top 0.635: TEENSY.3 JP1.4 64.77,12.7 68.58,8.89 CANCONN.1
P4
  Top 0.635: TEENSY.4 JP1.5 67.31,15.24 73.66,8.89 CANCONN.2
P5
  Top 0.635: JP1.6 TEENSY.5 57.15,19.05 54.61,21.59 54.61,34.29 55.88,35.56 55.88,41.76 R9.1 56.52,44.93 U$19.7
P6
  Top 0.635: TEENSY.6 JP1.7 R3.2
P7
  Top 0.635: TEENSY.7 JP1.8 R12.2
P8
  Top 0.635: TEENSY.8 JP1.9 R16.2
P9
  Top 0.635: TEENSY.9 JP1.10 R20.2
P10
  Top 0.635: JP1.11 TEENSY.10
P11
  Top 0.635: TEENSY.11 JP1.12
P12  (via drill 0.6)
  Top 0.635: v49.53,40.64 v54.61,40.64
  Bottom 0.635: P12-23.12 39.5,39.24 48.13,39.24 v49.53,40.64 | v54.61,40.64 54.74,40.64 TEENSY.12
P13
  Top 0.635: P12-23.11 TEENSY.13
P14  (via drill 0.6)
  Top 0.635: P12-23.10 TEENSY.14 | v34.29,30.48 v31.75,27.94 | v27.94,22.86 15.24,22.86 v11.43,19.05
  Bottom 0.635: P12-23.10 38.1,34.29 v34.29,30.48 | v31.75,27.94 31.75,26.67 v27.94,22.86 | v11.43,19.05 X1.9
P15
  Top 0.254: 44.45,15.24 38.1,15.24 | 22.86,10.16 20.32,10.16
  Top 0.635: TEENSY.15 P12-23.9 44.45,31.75 45.72,30.48 45.72,16.51 44.45,15.24 | 5.08,3.81 X1.12 11.43,3.81 17.78,10.16 20.32,10.16 | 38.1,15.24 27.3,15.24 22.86,10.16
P16
  Top 0.635: TEENSY.16 P12-23.8 38.1,29.21 34.29,33.02 24.13,33.02 22.86,34.29 22.86,41.91 21.59,43.18 IC1.1
  Bottom 0.635: IC1.1 22.71,43.18 R30.1 25.38,43.33 C20.1
P17  (via drill 0.6)
  Top 0.635: TEENSY.17 P12-23.7 24.13,26.67 v16.51,34.29
  Bottom 0.635: v16.51,34.29 X1.6
P18  (via drill 0.6)
  Top 0.635: TEENSY.18 P12-23.6 34.29,24.13 v33.02,22.86 | U$8.2 21.59,11.43 v30.48,20.32
  Bottom 0.635: v30.48,20.32 v33.02,22.86
P19  (via drill 0.6)
  Top 0.635: TEENSY.19 P12-23.5 v35.56,21.59 | v32.38,18.41 v30.48,16.51 | v24.13,16.51 U$8.1
  Bottom 0.635: v35.56,21.59 v32.38,18.41 | v30.48,16.51 v24.13,16.51
P20
  Top 0.635: P12-23.4 TEENSY.20
P21  (via drill 0.6)
  Top 0.635: TEENSY.21 P12-23.3 36.83,16.51 v27.94,25.4 | v27.94,27.94 27.94,30.48 v29.21,31.75 | v31.75,34.29 31.75,38.1 v31.11,38.73
  Bottom 0.508: 25.55,38.25 IC1.7
  Bottom 0.635: C22.1 22.88,38.25 R34.1 25.55,38.25 | v27.94,25.4 v27.94,27.94 | v29.21,31.75 v31.75,34.29 | v31.11,38.73 29.21,40.64 IC1.7
P22
  Top 0.254: 46.99,38.1 46.99,35.56
  Top 0.635: P12-23.2 TEENSY.22 45.72,13.97 46.99,15.24 46.99,35.56 | C15.1 40.64,49.53 40.01,48.9 ACTUALLYACS722.7 40.01,41.27 41.91,39.37 45.72,39.37 46.99,38.1
P23
  Top 0.635: P12-23.1 TEENSY.23

## Text on the board
tNames: ETC module V1.0 | github.com/francisconroy | Franks Air Requirement Thingy